# EAGLE board pic_circuit (EAGLE 8.1.0)
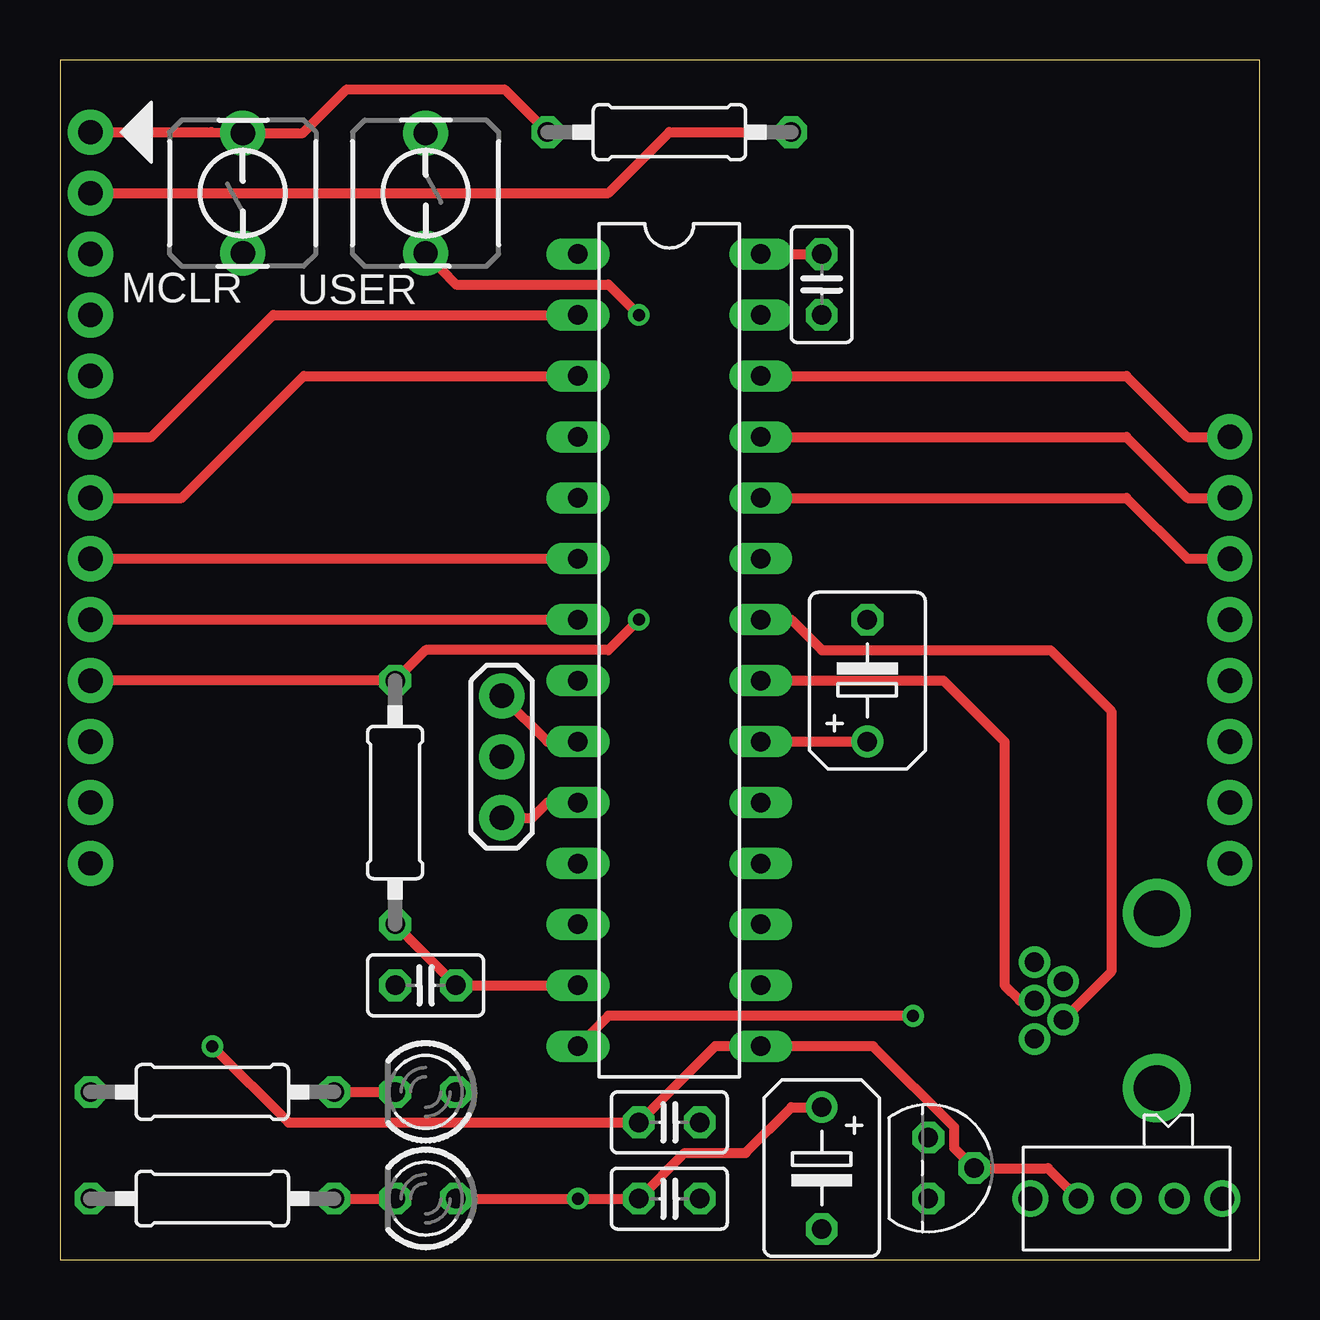
[diagram p0: board, top side]
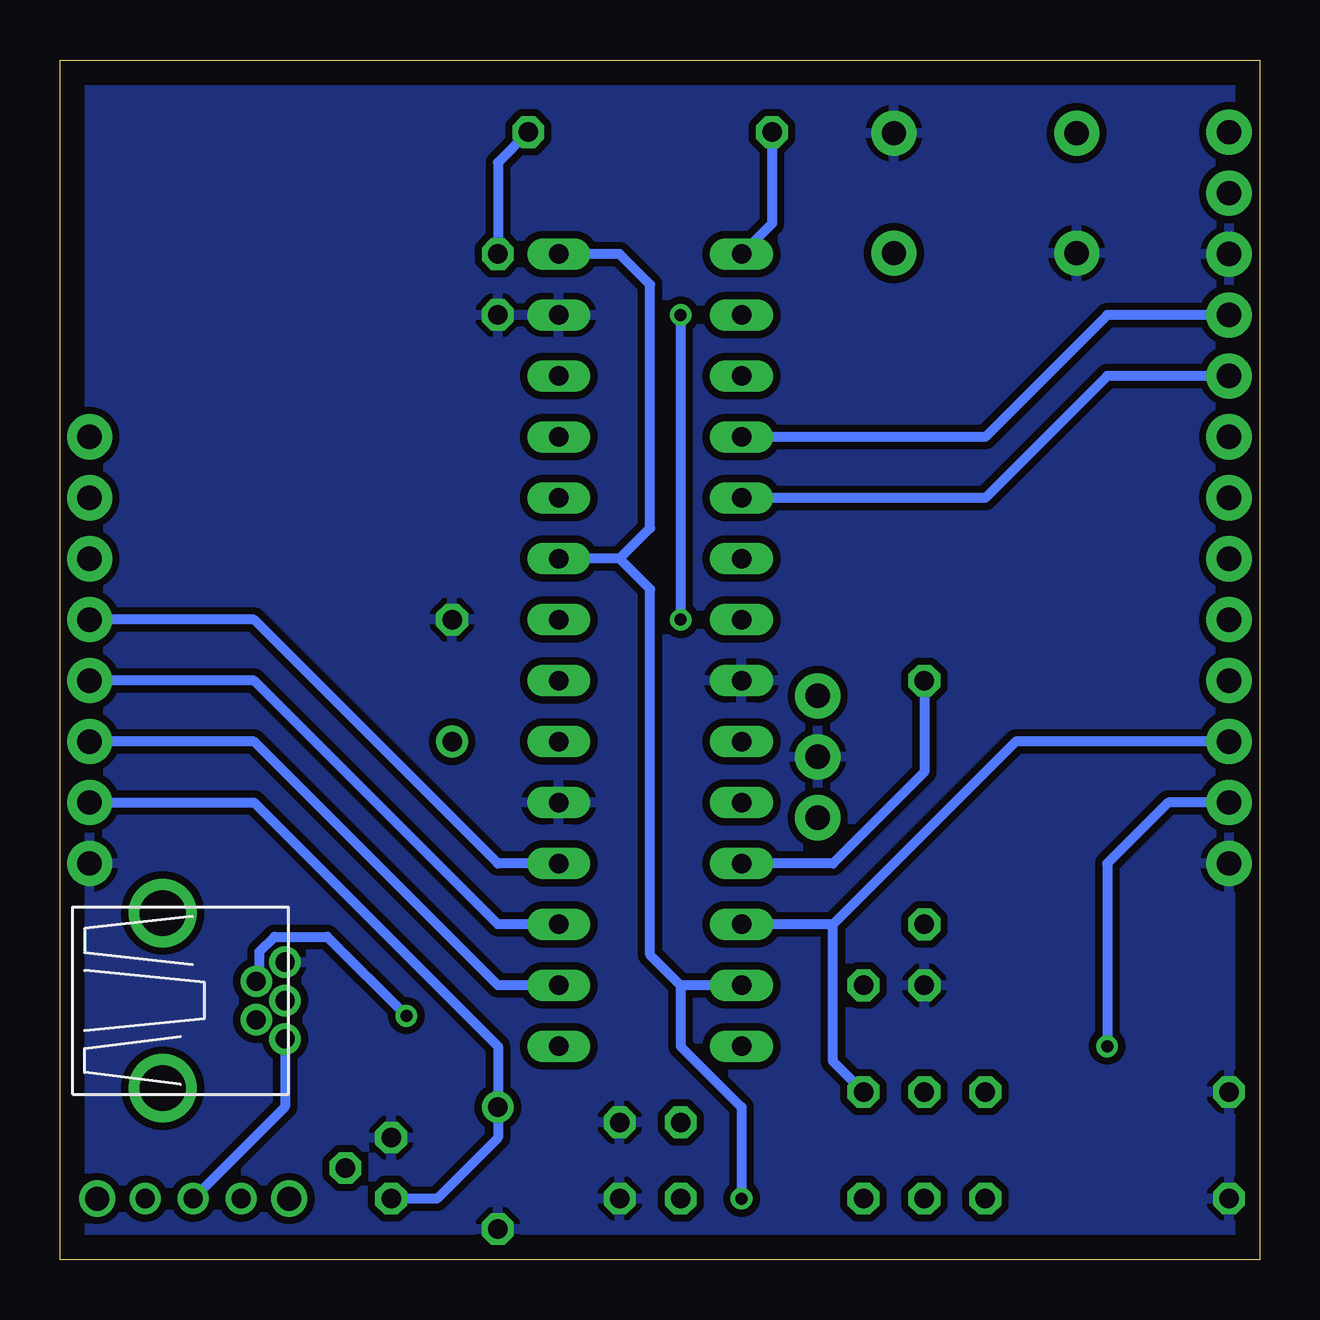
[diagram p1: board, bottom side, seen from below]

Size 50 x 50 mm. Coordinates in mm from the lower left corner, seen from the top.
Outline: 0,0 50,0 50,50 0,50 0,0
Copper layers (1*16): Top 0.035mm / dielectric 1.5mm / Bottom 0.035mm
Design rules "default": minimum track width 10mil, minimum drill 24mil, track to track 8mil, track to pad 8mil, pad to pad 8mil, via to via 8mil, smd to smd 8mil, copper to edge 40mil, drill to drill 8mil, minimum pad ring 10mil, minimum via ring 8mil, stop-mask expansion 4mil, vias tented up to drill 0mil, thermal gap 10mil

## Footprints (pad centres in the part's own frame; a part is rotated, then mirrored left to right if it is on the bottom)
C025-025X050 = drill 0.813 octagon: 1 -1.27,0; 2 1.27,0
B45181B = drill 0.813: + -2.54,0 | drill 0.813 octagon: - 2.54,0
USB-MB-H = drill 0.8: D+ 5.1,0; D- 3.9,0.8; GND 5.1,-1.6; ID 3.9,-0.8; VBUS 5.1,1.6 | drill 1.9: P$6 0,-3.65; P$7 0,3.65
LED3MM = drill 0.813 octagon: A -1.27,0; K 1.27,0
PUSHBUTTON = drill 1.016 pad 1.88: 1 -2.5,0; 2 2.5,0
0207/10 = drill 0.813 octagon: 1 -5.08,0; 2 5.08,0
DIL28-3 = drill 0.813 long: 1 -16.51,-3.81; 2 -13.97,-3.81; 3 -11.43,-3.81; 4 -8.89,-3.81; 5 -6.35,-3.81; 6 -3.81,-3.81; 7 -1.27,-3.81; 8 1.27,-3.81; 9 3.81,-3.81; 10 6.35,-3.81; 11 8.89,-3.81; 12 11.43,-3.81; 13 13.97,-3.81; 14 16.51,-3.81; 15 16.51,3.81; 16 13.97,3.81; 17 11.43,3.81; 18 8.89,3.81; 19 6.35,3.81; 20 3.81,3.81; 21 1.27,3.81; 22 -1.27,3.81; 23 -3.81,3.81; 24 -6.35,3.81; 25 -8.89,3.81; 26 -11.43,3.81; 27 -13.97,3.81; 28 -16.51,3.81
TO92 = drill 0.813 octagon: 1 -1.27,0; 2 0,1.905; 3 1.27,0
OSCILLATOR = drill 1.016 pad 1.88: 1 -2.54,0; 2 0,0; 3 2.54,0
1X05 = drill 1.016 pad 1.88: 1 0,0; 2 2.54,0; 3 5.08,0; 4 7.62,0; 5 10.16,0
SLIDE-SWITCH = drill 0.8: 1. -2,0; 2. 0,0; 3. 2,0 | drill 1: P$4 -4,0; P$5 4,0
1X08 = drill 1.016 pad 1.88: 1 0,0; 2 2.54,0; 3 5.08,0; 4 7.62,0; 5 10.16,0; 6 12.7,0; 7 15.24,0; 8 17.78,0

## Placement (x,y rotation side)
C1  0.1uF  [C025-025X050]  25.4,5.71 0 top
C2  10uF  [B45181B]  31.75,3.81 270 top
C3  10uF  [B45181B]  33.66,24.13 90 top
C4  0.1uF  [C025-025X050]  25.4,2.54 0 top
C5  0.1uF  [C025-025X050]  15.24,11.43 180 top
C6  0.1uF  [C025-025X050]  31.75,40.64 270 top
J1  USB-MB-H  [USB-MB-H]  45.72,10.79 180 top
LED1  RED  [LED3MM]  15.24,2.54 180 top
LED2  GRN  [LED3MM]  15.24,6.99 180 top
MCLR  PUSH  [PUSHBUTTON]  7.62,44.45 90 top
R1  330  [0207/10]  6.35,6.99 0 top
R2  330  [0207/10]  6.35,2.54 0 top
R3  10k  [0207/10]  13.97,19.05 270 top
R4  10k  [0207/10]  25.4,46.99 0 top
U$1  PIC32  [DIL28-3]  25.4,25.4 270 top
U$2  MCP1702  [TO92]  36.2,3.81 270 top
U$3  OSC  [OSCILLATOR]  18.41,20.95 270 top
U$4  PICKIT3  [1X05]  1.27,46.99 270 top
U$5  SLIDE  [SLIDE-SWITCH]  44.45,2.54 0 top
U$6  CONN_08  [1X08]  1.27,16.51 90 top
U$7  CONN_08  [1X08]  48.77,16.51 90 top
USER  PUSH  [PUSHBUTTON]  15.24,44.45 270 top

## Library data of the parts
C1-C6 J1 LED1 LED2 MCLR R1-R4 U$1-U$7 USER = pic_circuit

## Nets
+3V3: C2.+ C4.1 C5.1 C6.1 LED1.A R3.2 R4.2 U$1.13 U$1.23 U$1.28 U$2.3 U$4.2 U$7.2
+5V: C1.1 U$1.15 U$2.2 U$5.1. U$6.2
A0: U$1.2 U$6.8
A1: U$1.3 U$6.7
B2: U$1.6 U$6.6
B3: U$1.7 U$6.5
B7: U$1.16 U$7.3
B8: U$1.17 U$7.4
B9: U$1.18 U$7.5
B13: U$1.24 U$7.6
B14: U$1.25 U$7.7
B15: U$1.26 U$7.8
D+: J1.D+ U$1.21
D-: J1.D- U$1.22
GND: C1.2 C2.- C3.- C4.2 C5.2 C6.2 J1.GND MCLR.1 R1.1 R2.1 U$1.8 U$1.19 U$1.27 U$2.1 U$3.2 U$4.3 U$6.1 U$7.1 USER.1
LED2: LED2.A U$1.12 U$6.3
MCLR: MCLR.2 R4.1 U$1.1 U$4.1
N$1: J1.VBUS U$5.2.
N$3: U$1.4 U$4.4
N$4: LED1.K R2.2
N$5: U$1.5 U$4.5
N$6: C3.+ U$1.20
N$7: U$1.9 U$3.1
N$8: U$1.10 U$3.3
N$9: LED2.K R1.2
USBID: J1.ID U$1.14
USER: R3.1 U$1.11 U$6.4 USER.2

## Tracks (layer width: path | path; a pad name or v marks a point on that pad's centre or on a via)
+3V3  (via drill 0.5)
  Top 0.406: U$1.28 C6.1 | LED1.A v21.59,2.54 C4.1 26.04,4.45 28.57,4.45 30.48,6.35 C2.+ | U$1.13 C5.1 R3.2 | U$4.2 22.86,44.45 25.4,46.99 R4.2
  Bottom 0.406: U$7.2 41.91,19.05 31.75,8.89 C2.+ 31.75,5.08 34.29,2.54 U$2.3 | R4.2 31.75,45.72 C6.1 | U$1.13 24.13,11.43 | 24.13,11.43 25.4,12.7 25.4,27.94 26.67,29.21 | 26.67,29.21 U$1.23 | 26.67,29.21 25.4,30.48 25.4,40.64 26.67,41.91 U$1.28 | 24.13,11.43 24.13,8.89 21.59,6.35 v21.59,2.54
+5V  (via drill 0.5)
  Top 0.406: v6.35,8.89 9.53,5.71 C1.1 27.3,8.89 U$1.15 33.89,8.89 37.26,5.52 37.26,4.65 U$2.2 41.18,3.81 U$5.1.
  Bottom 0.406: U$6.2 3.81,19.05 6.35,16.51 v6.35,8.89
A0
  Top 0.406: U$6.8 3.81,34.29 8.89,39.37 U$1.2
A1
  Top 0.406: U$6.7 5.08,31.75 10.16,36.83 U$1.3
B2
  Top 0.406: U$6.6 U$1.6
B3
  Top 0.406: U$6.5 U$1.7
B7
  Bottom 0.406: U$1.16 31.75,11.43 41.91,21.59 U$7.3
B8
  Bottom 0.406: U$1.17 31.75,13.97 41.91,24.13 U$7.4
B9
  Bottom 0.406: U$1.18 31.75,16.51 41.91,26.67 U$7.5
B13
  Top 0.406: U$1.24 44.45,31.75 46.99,29.21 U$7.6
B14
  Top 0.406: U$1.25 44.45,34.29 46.99,31.75 U$7.7
B15
  Top 0.406: U$1.26 44.45,36.83 46.99,34.29 U$7.8
D+
  Top 0.406: U$1.21 36.83,24.13 39.37,21.59 39.37,11.43 40.01,10.79 J1.D+
D-
  Top 0.406: U$1.22 30.48,26.67 31.75,25.4 41.27,25.4 43.81,22.86 43.81,11.99 J1.D-
GND
  pour Bottom (isolate 0.305): 0,50.16 0,0 50.16,0 50.16,50.16
LED2
  Bottom 0.406: U$6.3 10.16,21.59 17.78,13.97 | 20.32,13.97 U$1.12 17.78,13.97 | LED2.A 17.78,8.26 17.78,13.97
MCLR
  Top 0.406: U$4.1 6.31,46.99 MCLR.2 10.12,46.95 11.95,48.78 18.53,48.78 R4.1
  Bottom 0.406: R4.1 20.32,43.18 U$1.1
N$1
  Bottom 0.406: J1.VBUS 40.62,6.37 U$5.2.
N$3
  Bottom 0.406: U$4.4 6.35,39.37 11.43,34.29 U$1.4
N$4
  Top 0.406: R2.2 LED1.K
N$5
  Bottom 0.406: U$4.5 6.35,36.83 11.43,31.75 U$1.5
N$6
  Top 0.406: U$1.20 C3.+
N$7
  Top 0.406: U$3.1 20.32,21.59 U$1.9
N$8
  Top 0.406: U$3.3 19.68,18.41 20.32,19.05 U$1.10
N$9
  Top 0.406: R1.2 LED2.K
USBID  (via drill 0.5)
  Top 0.406: v35.56,10.16 22.86,10.16 U$1.14
  Bottom 0.406: J1.ID 41.68,11.73 41.68,12.83 41.06,13.46 38.85,13.46 v35.56,10.16
USER  (via drill 0.5)
  Top 0.406: U$6.4 R3.1 15.24,25.4 22.86,25.4 v24.13,26.67 | USER.2 16.51,40.64 22.86,40.64 v24.13,39.37
  Bottom 0.406: U$1.11 17.78,16.51 13.97,20.32 R3.1 | v24.13,39.37 v24.13,26.67